# Altium PCB 矩阵键盘.PcbDoc
Units mm, origin at the board's own origin, x right, y up, seen from the top; angles counter-clockwise.
Board outline 152.4 x 101.6 mm, 2 copper layers (Top Layer, Bottom Layer); 17 components, 8 nets, 76 pads, 0 vias.
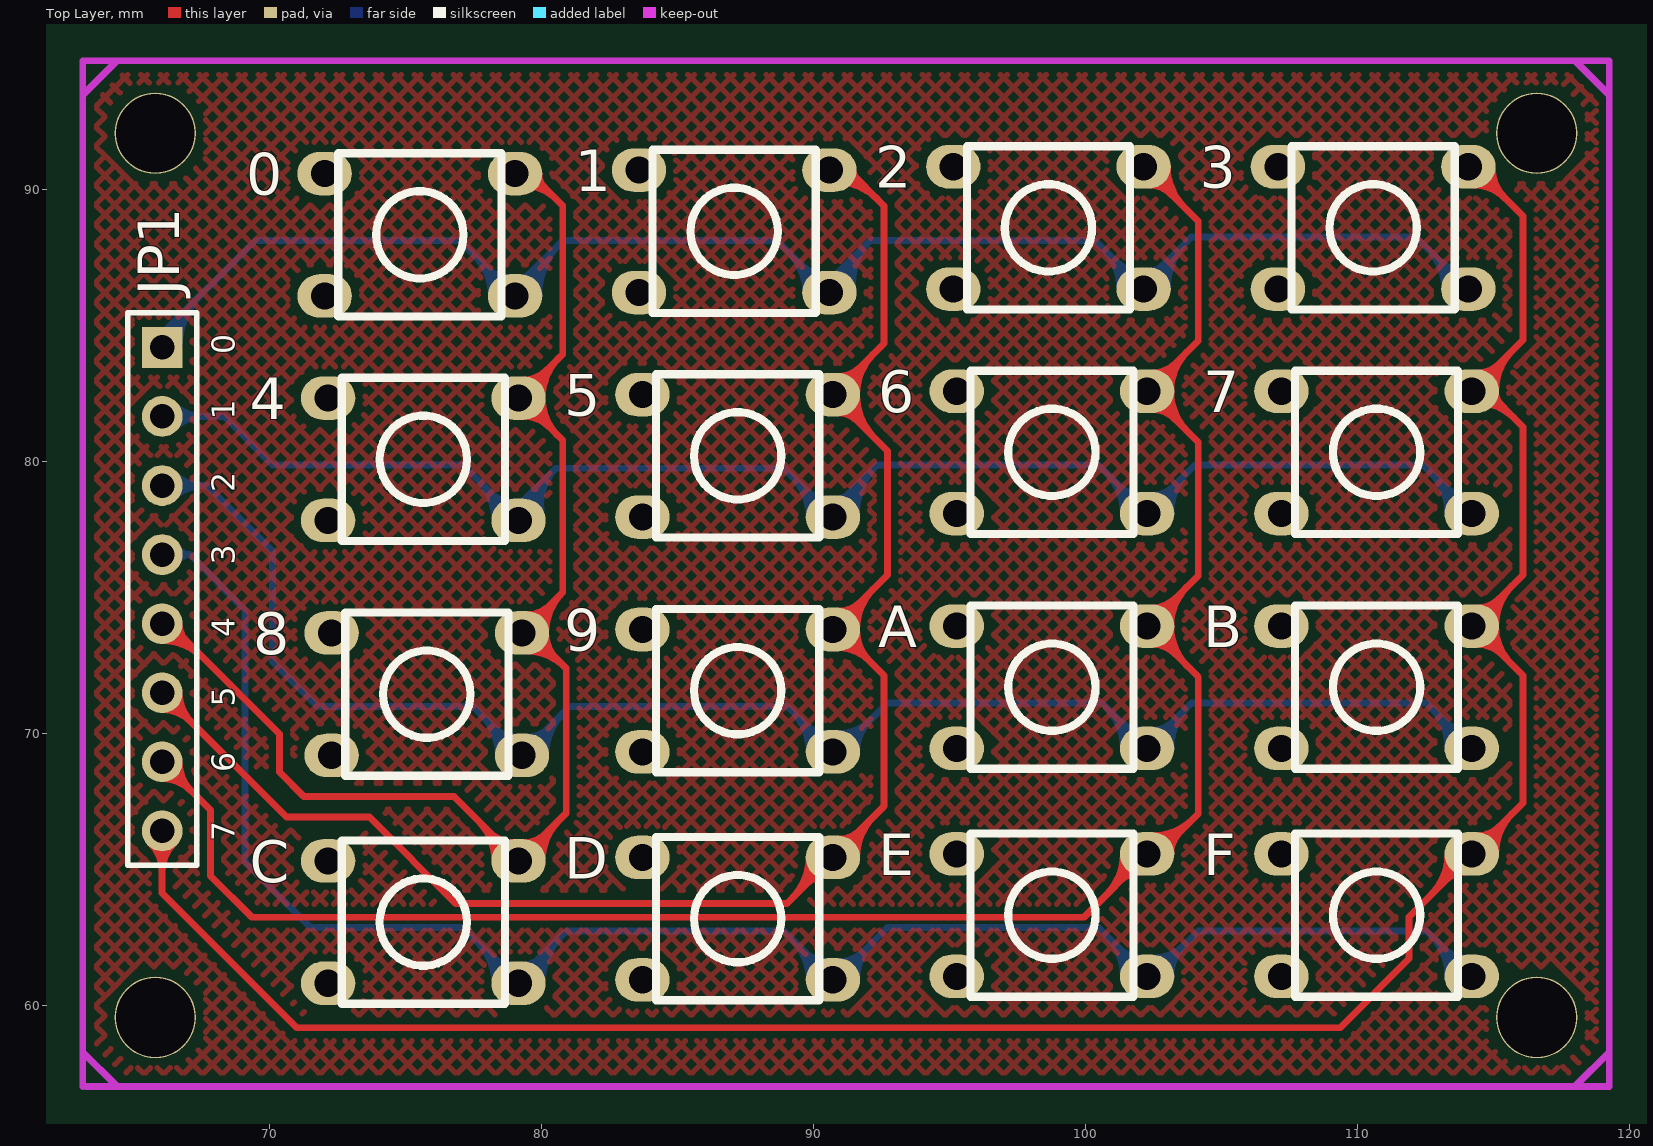
[diagram p0: Top Layer view]
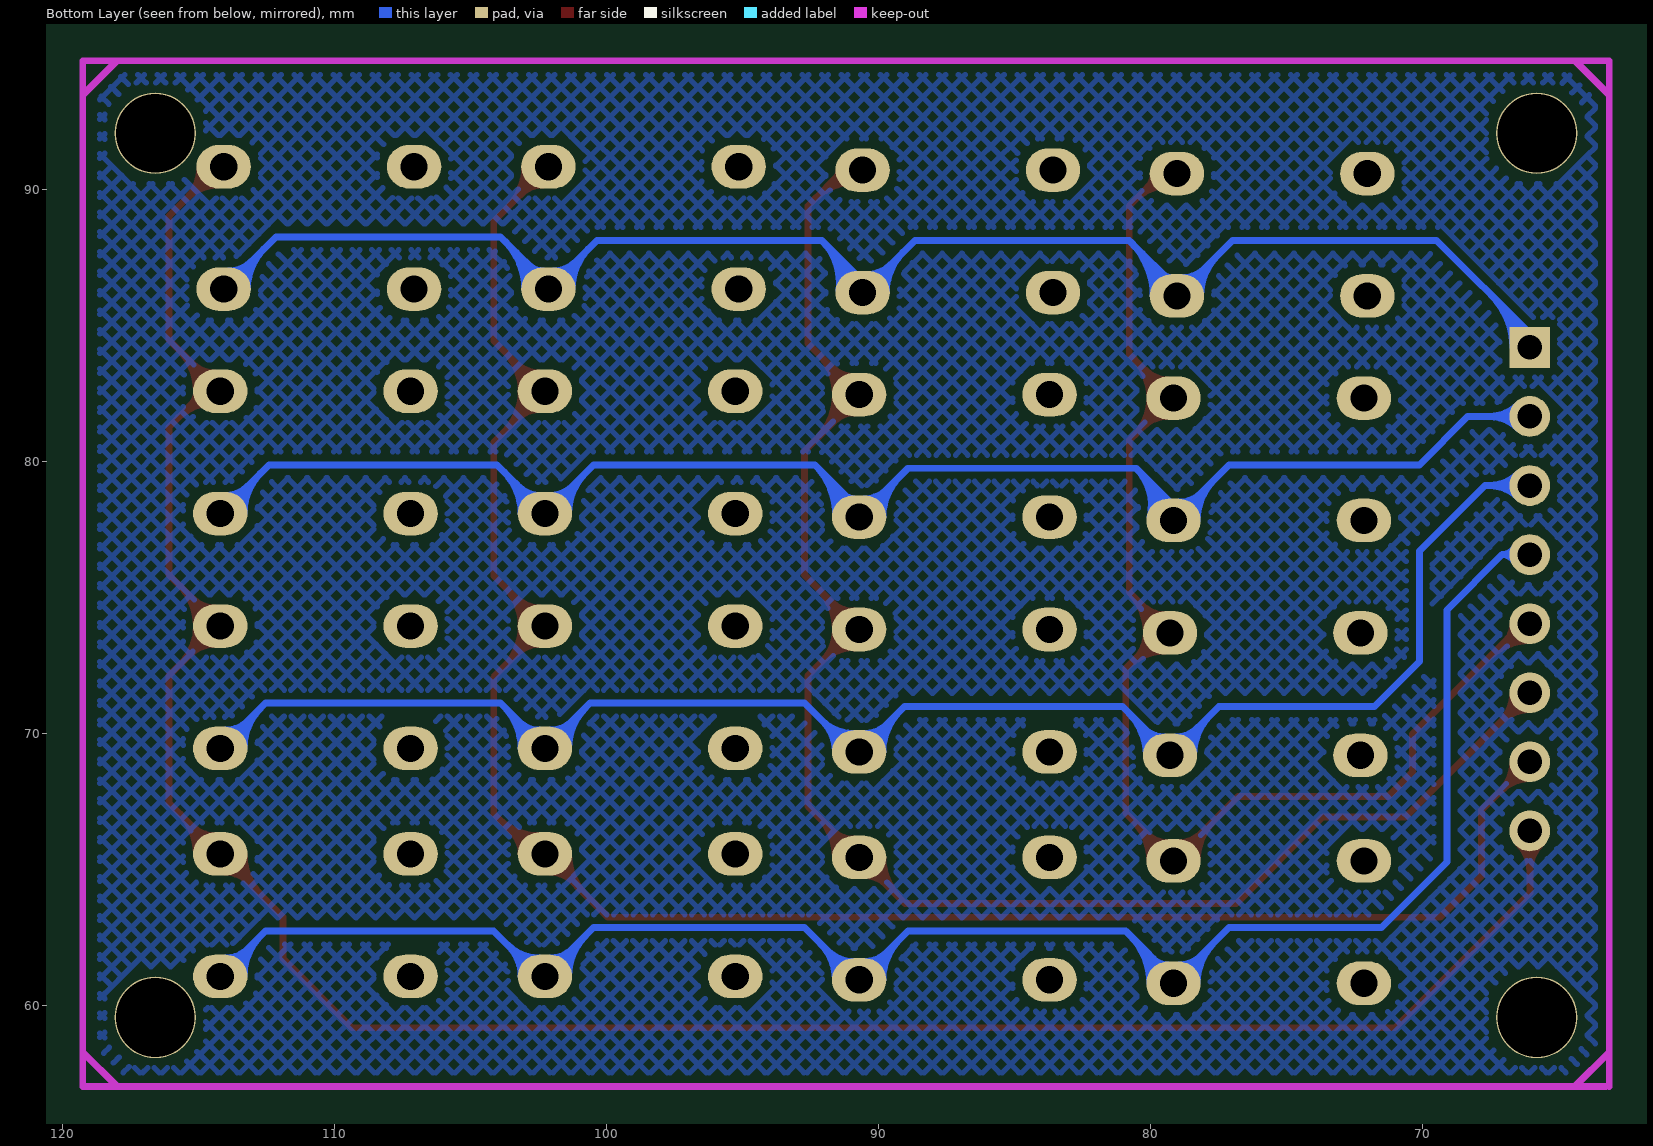
[diagram p1: Bottom Layer view, seen from below]

## Layer stack, top to bottom
Top Layer: signal copper 0.0356
Dielectric: dielectric 0.32, FR-4, Dk 4.8
Bottom Layer: signal copper 0.0356

## Board outline
25.4,25.4 177.8,25.4 177.8,127 25.4,127

## Design rules (kind name [scope] priority, off if disabled: settings)
Clearance [All] p1: gap=0.254
ComponentClearance [All] p1: gap=0.254 collisioncheckmode=3 verticalgap=0.254
PolygonConnect [All] p1: connectstyle=Relief reliefconductorwidth=0.254 reliefentries=4 polygonreliefangle="90 Angle"
RoutingVias [All] p1: holewidth=0.711 width=1.27 viastyle="Through Hole" minholewidth=0.711 minwidth=1.27 maxholewidth=0.711 maxwidth=1.27
SolderMaskExpansion [All] p1: expansion=0.102
TestPointUsage [All] p1: valid=0 allowmultiple=FALSE
Testpoint [All] p1: side=15 testpointundercomponent=TRUE minsize=1.016 maxsize=2.54 preferedsize=1.524 minholesize=0 maxholesize=1.016 preferedholesize=0.813 testpointgrid=0.025 style=1023 order=0-112345678
Width [All] p1: maxlimit=0.254 minlimit=0.254 preferedwidth=0.254
17 further rules are at their usual default settings.

## Classes and differential pairs
component class 矩阵键盘: 0 2 3 4 5 6 7 8 9 A B C D E F JP1

## Components (designator, comment, footprint, x,y, rotation, side; value= is the part's Value field where it differs from the comment)
0 "key1" an-6*6 69.342,93.472 r180 top
1 "key1" an-6*6 80.899,93.599 r180 top
2 "key1" an-6*6 92.456,93.726 r180 top
3 "key1" an-6*6 104.394,93.726 r180 top
4 "key2" an-6*6 69.469,85.217 r180 top
5 "key2" an-6*6 81.026,85.344 r180 top
6 "key2" an-6*6 92.583,85.471 r180 top
7 "key2" an-6*6 104.521,85.471 r180 top
8 "key3" an-6*6 69.596,76.581 r180 top
9 "key3" an-6*6 81.026,76.708 r180 top
A "key3" an-6*6 92.583,76.835 r180 top
B "key3" an-6*6 104.521,76.835 r180 top
C "key4" an-6*6 69.469,68.199 r180 top
D "key4" an-6*6 81.026,68.326 r180 top
E "key4" an-6*6 92.583,68.453 r180 top
F "key4" an-6*6 104.521,68.453 r180 top
JP1 "4*4矩阵键盘接口" HDR1X8 66.04,84.201 r270 top

## Footprints (in the part's own frame and the unit in brackets; to place one, negate y for a bottom-side part, rotate by r counter-clockwise, add the part's x,y. Pads: shape width x height; smd on the part's side, far side on the other; paste and mask are expansions set on the pad)
an-6*6 [mm]
  oval 2x1.6 hole 1: 1(-9.675,7.381) 2(-9.675,2.881) 3(-2.675,2.881) 4(-2.675,7.381)
  silkscreen extent -9.17,2.13 -3.18,8.13
HDR1X8 [mm] "Connector; Header; 8 Position"
  rect 1.5x1.5 hole 0.9: 1(0,0)
  round 1.5 hole 0.9: 2(2.54,0) 3(5.08,0) 4(7.62,0) 5(10.16,0) 6(12.7,0) 7(15.24,0) 8(17.78,0)
  silkscreen extent -1.27,-1.27 19.05,1.27

## Part data
0 1 2 3 4 5 6 7 8 9 A B C D E F: library part key
JP1: library part "Header 8", "Header, 8-Pin"

## Free pads (board coordinates)
  round 3 hole 2.9: 0(65.786,59.563) 0(65.786,92.075) 0(116.586,59.563) 0(116.586,92.075)

## Nets (pads, with @x,y where several pads share a name; then routed paths per layer and width w, separated by ;. In a path a pad name is that pad's centre, name@x,y a point inside that pad or via, vN(x,y) a via of type N, cw(c..) or ccw(c..) an arc to the next point about the centre after c; other vN are vias at no path point)
Net0_1: 0.1 1.1 2.1 3.1 JP1.1 | length 128.7
  Bottom Layer w0.254: JP1.1 66.04,84.709 69.469,88.138 76.97,88.138 0.1 79.017,86.383 80.772,88.138 88.654,88.138 1.1 90.574,86.637 92.075,88.138 ; 3.1 112.149,88.265 103.886,88.265 102.131,86.51 2.1 100.338,88.138 92.075,88.138 ; 92.075,88.138 ccw(c93.643,86.57) 91.442,86.3 cw(c93.643,86.57) 92.075,88.138 ; JP1.1@66.155,84.201 cw(c67.659,84.201) 66.596,85.265 ccw(c67.659,84.201) JP1.1@66.155,84.201 ; JP1.1@66.409,84.201 cw(c68.526,84.201) 67.029,85.698 ccw(c68.526,84.201) JP1.1@66.409,84.201 ; JP1.1@66.663,84.201 cw(c69.393,84.201) 67.463,86.132 ccw(c69.393,84.201) JP1.1@66.663,84.201 ; 77.527,87.582 cw(c76.036,86.091) 78.144,86.091 ccw(c76.036,86.091) 77.527,87.582 ; 77.96,87.148 cw(c76.904,86.091) 78.398,86.091 ccw(c76.904,86.091) 77.96,87.148 ; 78.01,87.099 ccw(c78.817,87.906) 78.817,86.764 cw(c78.817,87.906) 78.01,87.099 ; 0.1@79.217,86.764 ccw(c79.217,87.202) 79.526,86.892 cw(c79.217,87.202) 0.1@79.217,86.764 ; 0.1@79.382,86.091 cw(c80.968,86.091) 79.846,87.212 ccw(c80.968,86.091) 0.1@79.382,86.091 ; 0.1@79.636,86.091 cw(c81.835,86.091) 80.28,87.646 ccw(c81.835,86.091) 0.1@79.636,86.091 ; 0.1@79.89,86.091 cw(c82.702,86.091) 80.714,88.08 ccw(c82.702,86.091) 0.1@79.89,86.091 ; 89.084,87.709 cw(c87.593,86.218) 89.701,86.218 ccw(c87.593,86.218) 89.084,87.709 ; 89.517,87.275 cw(c88.461,86.218) 89.955,86.218 ccw(c88.461,86.218) 89.517,87.275 ; 89.567,87.226 ccw(c90.374,88.033) 90.374,86.891 cw(c90.374,88.033) 89.567,87.226 ; 1.1@90.686,86.207 cw(c91.674,86.329) 90.97,87.033 ccw(c91.674,86.329) 1.1@90.686,86.207 ; 1.1@90.938,86.238 cw(c92.331,86.409) 91.338,87.401 ccw(c92.331,86.409) 1.1@90.938,86.238 ; 1.1@91.19,86.269 cw(c92.987,86.49) 91.707,87.77 ccw(c92.987,86.49) 1.1@91.19,86.269 ; 100.641,87.836 cw(c99.15,86.345) 101.258,86.345 ccw(c99.15,86.345) 100.641,87.836 ; 101.074,87.402 cw(c100.018,86.345) 101.512,86.345 ccw(c100.018,86.345) 101.074,87.402 ; 101.124,87.353 ccw(c101.931,88.16) 101.931,87.018 cw(c101.931,88.16) 101.124,87.353 ; 2.1@102.331,87.018 ccw(c102.331,87.762) 102.857,87.236 cw(c102.331,87.762) 2.1@102.331,87.018 ; 2.1@102.496,86.345 cw(c103.775,86.345) 102.871,87.25 ccw(c103.775,86.345) 2.1@102.496,86.345 ; 2.1@102.75,86.345 cw(c104.642,86.345) 103.304,87.683 ccw(c104.642,86.345) 2.1@102.75,86.345 ; 2.1@103.004,86.345 cw(c105.509,86.345) 103.738,88.117 ccw(c105.509,86.345) 2.1@103.004,86.345 ; 112.579,87.836 cw(c111.088,86.345) 113.196,86.345 ccw(c111.088,86.345) 112.579,87.836 ; 113.012,87.402 cw(c111.956,86.345) 113.45,86.345 ccw(c111.956,86.345) 113.012,87.402 ; 113.062,87.353 ccw(c113.869,88.16) 113.869,87.018 cw(c113.869,88.16) 113.062,87.353
Net0_2: 0.2 4.2 8.2 C.2 JP1.5 | length 105.9
  Top Layer w0.254: JP1.5 66.294,74.041 70.358,69.977 70.358,68.58 71.247,67.691 76.771,67.691 C.2 80.899,67.073 80.899,72.39 79.589,73.7 8.2 80.772,75.201 80.772,80.772 79.208,82.336 4.2 80.772,83.964 80.772,89.408 79.589,90.591 0.2 ; 4.2@79.763,82.336 ccw(c81.103,82.336) 80.156,81.388 cw(c81.103,82.336) 4.2@79.763,82.336 ; 4.2@79.763,82.336 cw(c81.257,82.336) 80.201,83.393 ccw(c81.257,82.336) 4.2@79.763,82.336 ; 8.2@79.89,73.7 cw(c81.384,73.7) 80.328,74.757 ccw(c81.384,73.7) 8.2@79.89,73.7 ; 8.2@79.89,73.7 ccw(c80.617,73.7) 80.103,73.186 cw(c80.617,73.7) 8.2@79.89,73.7 ; 4.2@80.017,82.336 ccw(c81.971,82.336) 80.589,80.955 cw(c81.971,82.336) 4.2@80.017,82.336 ; 4.2@80.017,82.336 cw(c82.125,82.336) 80.634,83.826 ccw(c82.125,82.336) 4.2@80.017,82.336 ; 8.2@80.144,73.7 cw(c82.252,73.7) 80.761,75.19 ccw(c82.252,73.7) 8.2@80.144,73.7 ; 8.2@80.144,73.7 ccw(c81.484,73.7) 80.537,72.752 cw(c81.484,73.7) 8.2@80.144,73.7 ; JP1.5@66.04,73.418 cw(c66.04,71.301) 67.537,72.798 ccw(c66.04,71.301) JP1.5@66.04,73.418 ; JP1.5@66.04,73.672 cw(c66.04,72.168) 67.104,73.231 ccw(c66.04,72.168) JP1.5@66.04,73.672 ; JP1.5@66.663,74.041 ccw(c67.554,74.041) 66.924,73.411 cw(c67.554,74.041) JP1.5@66.663,74.041 ; 77.654,66.808 cw(c76.163,65.318) 78.271,65.318 ccw(c76.163,65.318) 77.654,66.808 ; 78.087,66.375 cw(c77.031,65.318) 78.525,65.318 ccw(c77.031,65.318) 78.087,66.375 ; 78.137,66.326 ccw(c78.944,67.133) 78.944,65.991 cw(c78.944,67.133) 78.137,66.326 ; 0.2@79.22,90.426 cw(c79.244,89.196) 80.114,90.066 ccw(c79.244,89.196) 0.2@79.22,90.426 ; 0.2@79.225,90.172 cw(c79.26,88.368) 80.536,89.644 ccw(c79.26,88.368) 0.2@79.225,90.172 ; C.2@79.344,65.991 ccw(c79.344,67.133) 80.151,66.326 cw(c79.344,67.133) C.2@79.344,65.991 ; 4.2@79.344,81.663 cw(c79.344,80.367) 80.26,81.284 ccw(c79.344,80.367) 4.2@79.344,81.663 ; 4.2@79.344,83.009 ccw(c79.344,84.151) 80.151,83.344 cw(c79.344,84.151) 4.2@79.344,83.009 ; 8.2@79.471,73.027 cw(c79.471,71.118) 80.821,72.468 ccw(c79.471,71.118) 8.2@79.471,73.027 ; 8.2@79.471,73.281 cw(c79.471,71.985) 80.387,72.902 ccw(c79.471,71.985) 8.2@79.471,73.281 ; 8.2@79.471,74.373 ccw(c79.471,75.515) 80.278,74.708 cw(c79.471,75.515) 8.2@79.471,74.373 ; C.2@79.763,65.318 cw(c81.257,65.318) 80.201,66.375 ccw(c81.257,65.318) C.2@79.763,65.318 ; 0.2@79.89,90.591 ccw(c80.617,90.591) 80.103,90.077 cw(c80.617,90.591) 0.2@79.89,90.591 ; C.2@80.017,65.318 cw(c82.125,65.318) 80.634,66.808 ccw(c82.125,65.318) C.2@80.017,65.318
Net1_2: 1.2 5.2 9.2 D.2 JP1.6 | length 120.8
  Top Layer w0.254: JP1.6 70.612,66.929 73.66,66.929 76.835,63.754 89.01,63.754 92.583,67.327 92.583,72.136 90.892,73.827 9.2 92.71,75.836 92.71,80.391 90.701,82.4 5.2 92.583,84.345 92.583,89.408 91.273,90.718 1.2 ; 66.67,70.871 ccw(c66.04,70.241) 66.04,71.132 cw(c66.04,70.241) 66.67,70.871 ; 66.67,70.871 cw(c67.3,71.501) 66.409,71.501 ccw(c67.3,71.501) 66.67,70.871 ; 67.104,70.437 ccw(c66.04,69.374) 66.04,70.878 cw(c66.04,69.374) 67.104,70.437 ; 67.104,70.437 cw(c68.167,71.501) 66.663,71.501 ccw(c68.167,71.501) 67.104,70.437 ; 9.2@91.32,73.827 ccw(c92.354,73.827) 91.623,73.096 cw(c92.354,73.827) 9.2@91.32,73.827 ; 9.2@91.32,73.827 cw(c92.814,73.827) 91.758,74.884 ccw(c92.814,73.827) 9.2@91.32,73.827 ; 5.2@91.32,82.463 ccw(c92.967,82.463) 91.802,81.299 cw(c92.967,82.463) 5.2@91.32,82.463 ; 5.2@91.32,82.463 cw(c92.814,82.463) 91.758,83.52 ccw(c92.814,82.463) 5.2@91.32,82.463 ; 9.2@91.574,73.827 ccw(c93.221,73.827) 92.056,72.663 cw(c93.221,73.827) 9.2@91.574,73.827 ; 9.2@91.574,73.827 cw(c93.682,73.827) 92.191,75.317 ccw(c93.682,73.827) 9.2@91.574,73.827 ; 5.2@91.574,82.463 ccw(c93.834,82.463) 92.236,80.865 cw(c93.834,82.463) 5.2@91.574,82.463 ; 5.2@91.574,82.463 cw(c93.682,82.463) 92.191,83.953 ccw(c93.682,82.463) 5.2@91.574,82.463 ; 89.211,63.955 ccw(c87.72,65.445) 89.828,65.445 cw(c87.72,65.445) 89.211,63.955 ; 89.644,64.388 ccw(c88.588,65.445) 90.082,65.445 cw(c88.588,65.445) 89.644,64.388 ; 89.694,64.438 cw(c90.501,63.63) 90.501,64.772 ccw(c90.501,63.63) 89.694,64.438 ; 1.2@90.774,90.299 cw(c90.774,88.083) 92.341,89.65 ccw(c90.774,88.083) 1.2@90.774,90.299 ; 1.2@90.774,90.553 cw(c90.774,88.951) 91.907,90.084 ccw(c90.774,88.951) 1.2@90.774,90.553 ; D.2@90.901,66.118 ccw(c90.901,67.26) 91.708,66.453 cw(c90.901,67.26) D.2@90.901,66.118 ; 9.2@90.901,73.154 cw(c90.901,71.552) 92.034,72.685 ccw(c90.901,71.552) 9.2@90.901,73.154 ; 9.2@90.901,73.408 cw(c90.901,72.419) 91.601,73.118 ccw(c90.901,72.419) 9.2@90.901,73.408 ; 9.2@90.901,74.5 ccw(c90.901,75.642) 91.708,74.835 cw(c90.901,75.642) 9.2@90.901,74.5 ; 5.2@90.901,81.79 cw(c90.901,80.801) 91.601,81.5 ccw(c90.901,80.801) 5.2@90.901,81.79 ; 5.2@90.901,83.136 ccw(c90.901,84.278) 91.708,83.471 cw(c90.901,84.278) 5.2@90.901,83.136 ; 5.2@91.066,82.463 ccw(c92.1,82.463) 91.369,81.732 cw(c92.1,82.463) 5.2@91.066,82.463 ; D.2@91.32,65.445 cw(c92.814,65.445) 91.758,66.502 ccw(c92.814,65.445) D.2@91.32,65.445 ; 1.2@91.447,90.718 ccw(c91.868,90.718) 91.57,90.421 cw(c91.868,90.718) 1.2@91.447,90.718 ; D.2@91.574,65.445 cw(c93.682,65.445) 92.191,66.935 ccw(c93.682,65.445) D.2@91.574,65.445
Net2_2: 2.2 6.2 A.2 E.2 JP1.7 | length 130.8
  Top Layer w0.254: JP1.7 67.818,67.183 67.818,64.77 69.342,63.246 99.932,63.246 E.2 102.656,65.572 104.14,67.056 104.14,72.072 A.2 102.275,73.954 104.14,75.819 104.14,80.708 6.2 102.275,82.59 104.14,84.455 104.14,88.836 2.2 ; 66.67,68.331 ccw(c66.04,67.701) 66.04,68.592 cw(c66.04,67.701) 66.67,68.331 ; 66.67,68.331 cw(c67.3,68.961) 66.409,68.961 ccw(c67.3,68.961) 66.67,68.331 ; 67.104,67.897 ccw(c66.04,66.834) 66.04,68.338 cw(c66.04,66.834) 67.104,67.897 ; 67.104,67.897 cw(c68.167,68.961) 66.663,68.961 ccw(c68.167,68.961) 67.104,67.897 ; A.2@102.877,73.954 ccw(c104.371,73.954) 103.315,72.897 cw(c104.371,73.954) A.2@102.877,73.954 ; A.2@102.877,73.954 cw(c104.33,73.954) 103.303,74.982 ccw(c104.33,73.954) A.2@102.877,73.954 ; 6.2@102.877,82.59 ccw(c104.371,82.59) 103.315,81.533 cw(c104.371,82.59) 6.2@102.877,82.59 ; 6.2@102.877,82.59 cw(c104.33,82.59) 103.303,83.618 ccw(c104.33,82.59) 6.2@102.877,82.59 ; A.2@103.131,73.954 ccw(c105.239,73.954) 103.748,72.464 cw(c105.239,73.954) A.2@103.131,73.954 ; A.2@103.131,73.954 cw(c105.197,73.954) 103.736,75.415 ccw(c105.197,73.954) A.2@103.131,73.954 ; 6.2@103.131,82.59 ccw(c105.239,82.59) 103.748,81.1 cw(c105.239,82.59) 6.2@103.131,82.59 ; 6.2@103.131,82.59 cw(c105.197,82.59) 103.736,84.051 ccw(c105.197,82.59) 6.2@103.131,82.59 ; 100.768,64.082 ccw(c99.277,65.572) 101.385,65.572 cw(c99.277,65.572) 100.768,64.082 ; 101.201,64.515 ccw(c100.145,65.572) 101.639,65.572 cw(c100.145,65.572) 101.201,64.515 ; 101.251,64.565 cw(c102.058,63.757) 102.058,64.899 ccw(c102.058,63.757) 101.251,64.565 ; 2.2@102.331,90.172 cw(c102.331,89.03) 103.138,89.838 ccw(c102.331,89.03) 2.2@102.331,90.172 ; E.2@102.458,65.991 ccw(c102.458,67.481) 103.512,66.428 cw(c102.458,67.481) E.2@102.458,65.991 ; E.2@102.458,66.245 ccw(c102.458,68.348) 103.945,66.861 cw(c102.458,68.348) E.2@102.458,66.245 ; A.2@102.458,73.281 cw(c102.458,72.139) 103.265,72.947 ccw(c102.458,72.139) A.2@102.458,73.281 ; A.2@102.458,74.627 ccw(c102.458,75.811) 103.295,74.974 cw(c102.458,75.811) A.2@102.458,74.627 ; 6.2@102.458,81.917 cw(c102.458,80.775) 103.265,81.583 ccw(c102.458,80.775) 6.2@102.458,81.917 ; 6.2@102.458,83.263 ccw(c102.458,84.447) 103.295,83.61 cw(c102.458,84.447) 6.2@102.458,83.263 ; 2.2@102.75,90.845 ccw(c104.244,90.845) 103.188,89.788 cw(c104.244,90.845) 2.2@102.75,90.845 ; 2.2@103.004,90.845 ccw(c105.112,90.845) 103.621,89.355 cw(c105.112,90.845) 2.2@103.004,90.845 ; E.2@103.131,65.572 cw(c104.277,65.572) 103.467,66.383 ccw(c104.277,65.572) E.2@103.131,65.572
Net3_2: 3.2 7.2 B.2 F.2 JP1.8 | length 145.5
  Top Layer w0.254: JP1.8 66.04,64.135 70.993,59.182 109.347,59.182 111.887,61.722 111.887,63.263 116.078,67.454 116.078,72.136 114.26,73.954 B.2 116.078,75.836 116.078,81.28 114.768,82.59 7.2 116.078,84.472 116.078,89.027 114.26,90.845 3.2 ; 66.04,64.917 ccw(c64.536,64.917) 65.599,65.98 cw(c64.536,64.917) 66.04,64.917 ; 66.04,64.917 cw(c67.544,64.917) 66.481,65.98 ccw(c67.544,64.917) 66.04,64.917 ; 66.04,65.53 ccw(c65.149,65.53) 65.779,66.16 cw(c65.149,65.53) 66.04,65.53 ; 66.04,65.53 cw(c66.931,65.53) 66.301,66.16 ccw(c66.931,65.53) 66.04,65.53 ; B.2@114.815,73.954 ccw(c116.155,73.954) 115.208,73.006 cw(c116.155,73.954) B.2@114.815,73.954 ; B.2@114.815,73.954 cw(c116.309,73.954) 115.253,75.011 ccw(c116.309,73.954) B.2@114.815,73.954 ; B.2@115.069,73.954 ccw(c117.023,73.954) 115.641,72.573 cw(c117.023,73.954) B.2@115.069,73.954 ; B.2@115.069,73.954 cw(c117.177,73.954) 115.686,75.444 ccw(c117.177,73.954) B.2@115.069,73.954 ; 7.2@115.069,82.59 cw(c117.177,82.59) 115.686,84.08 ccw(c117.177,82.59) 7.2@115.069,82.59 ; 7.2@115.069,82.59 ccw(c115.796,82.59) 115.282,82.076 cw(c115.796,82.59) 7.2@115.069,82.59 ; 112.706,64.082 ccw(c111.215,65.572) 113.323,65.572 cw(c111.215,65.572) 112.706,64.082 ; 113.139,64.515 ccw(c112.083,65.572) 113.577,65.572 cw(c112.083,65.572) 113.139,64.515 ; 113.189,64.565 cw(c113.996,63.757) 113.996,64.899 ccw(c113.996,63.757) 113.189,64.565 ; 3.2@114.269,90.172 cw(c114.269,88.57) 115.402,89.703 ccw(c114.269,88.57) 3.2@114.269,90.172 ; 3.2@114.269,90.426 cw(c114.269,89.437) 114.969,90.136 ccw(c114.269,89.437) 3.2@114.269,90.426 ; F.2@114.396,66.245 ccw(c114.396,67.387) 115.203,66.58 cw(c114.396,67.387) F.2@114.396,66.245 ; B.2@114.396,73.281 cw(c114.396,71.985) 115.312,72.902 ccw(c114.396,71.985) B.2@114.396,73.281 ; B.2@114.396,74.627 ccw(c114.396,75.769) 115.203,74.962 cw(c114.396,75.769) B.2@114.396,74.627 ; 7.2@114.396,82.171 cw(c114.396,80.262) 115.746,81.612 ccw(c114.396,80.262) 7.2@114.396,82.171 ; 7.2@114.396,82.425 cw(c114.396,81.129) 115.312,82.046 ccw(c114.396,81.129) 7.2@114.396,82.425 ; 7.2@114.396,83.263 ccw(c114.396,84.405) 115.203,83.598 cw(c114.396,84.405) 7.2@114.396,83.263 ; 3.2@114.688,90.845 ccw(c115.722,90.845) 114.991,90.114 cw(c115.722,90.845) 3.2@114.688,90.845 ; F.2@114.815,65.572 cw(c116.309,65.572) 115.253,66.629 ccw(c116.309,65.572) F.2@114.815,65.572 ; 7.2@114.815,82.59 cw(c116.309,82.59) 115.253,83.647 ccw(c116.309,82.59) 7.2@114.815,82.59 ; 3.2@114.942,90.845 ccw(c116.589,90.845) 115.424,89.681 cw(c116.589,90.845) 3.2@114.942,90.845 ; F.2@115.069,65.572 cw(c117.177,65.572) 115.686,67.062 ccw(c117.177,65.572) F.2@115.069,65.572
Net4_1: 4.1 5.1 6.1 7.1 JP1.2 | length 123.7
  Bottom Layer w0.254: JP1.2 68.326,81.661 70.104,79.883 77.097,79.883 4.1 79.144,78.382 80.518,79.756 ; 7.1 112.403,79.883 104.013,79.883 102.258,78.128 6.1 100.465,79.883 92.329,79.883 ; 66.931,81.661 ccw(c66.931,80.77) 66.301,81.4 cw(c66.931,80.77) 66.931,81.661 ; 66.931,81.661 cw(c66.931,82.552) 66.301,81.922 ccw(c66.931,82.552) 66.931,81.661 ; 67.544,81.661 ccw(c67.544,80.157) 66.481,81.22 cw(c67.544,80.157) 67.544,81.661 ; 67.544,81.661 cw(c67.544,83.165) 66.481,82.102 ccw(c67.544,83.165) 67.544,81.661 ; 80.518,79.756 ccw(c81.876,78.398) 80.001,77.982 cw(c81.876,78.398) 80.518,79.756 ; 80.518,79.756 88.908,79.756 5.1 90.701,78.255 92.329,79.883 ; 92.329,79.883 ccw(c94.155,78.057) 91.574,77.983 cw(c94.155,78.057) 92.329,79.883 ; 77.654,79.327 cw(c76.163,77.836) 78.271,77.836 ccw(c76.163,77.836) 77.654,79.327 ; 78.087,78.893 cw(c77.031,77.836) 78.525,77.836 ccw(c77.031,77.836) 78.087,78.893 ; 78.137,78.844 ccw(c78.944,79.651) 78.944,78.509 cw(c78.944,79.651) 78.137,78.844 ; 4.1@79.257,77.817 cw(c80.269,78.041) 79.536,78.774 ccw(c80.269,78.041) 4.1@79.257,77.817 ; 4.1@79.505,77.872 cw(c80.804,78.16) 79.863,79.101 ccw(c80.804,78.16) 4.1@79.505,77.872 ; 4.1@79.753,77.927 cw(c81.34,78.279) 80.191,79.429 ccw(c81.34,78.279) 4.1@79.753,77.927 ; 89.211,79.454 cw(c87.72,77.963) 89.828,77.963 ccw(c87.72,77.963) 89.211,79.454 ; 89.644,79.02 cw(c88.588,77.963) 90.082,77.963 ccw(c88.588,77.963) 89.644,79.02 ; 89.694,78.971 ccw(c90.501,79.778) 90.501,78.636 cw(c90.501,79.778) 89.694,78.971 ; 5.1@90.901,78.636 ccw(c90.901,79.074) 91.21,78.764 cw(c90.901,79.074) 5.1@90.901,78.636 ; 5.1@91.066,77.968 cw(c92.535,78.01) 91.496,79.05 ccw(c92.535,78.01) 5.1@91.066,77.968 ; 5.1@91.32,77.975 cw(c93.345,78.034) 91.912,79.466 ccw(c93.345,78.034) 5.1@91.32,77.975 ; 100.768,79.581 cw(c99.277,78.09) 101.385,78.09 ccw(c99.277,78.09) 100.768,79.581 ; 101.201,79.147 cw(c100.145,78.09) 101.639,78.09 ccw(c100.145,78.09) 101.201,79.147 ; 101.251,79.098 ccw(c102.058,79.905) 102.058,78.763 cw(c102.058,79.905) 101.251,79.098 ; 6.1@102.458,78.763 ccw(c102.458,79.814) 103.201,79.071 cw(c102.458,79.814) 6.1@102.458,78.763 ; 6.1@102.623,78.09 cw(c103.595,78.09) 102.908,78.778 ccw(c103.595,78.09) 6.1@102.623,78.09 ; 6.1@102.877,78.09 cw(c104.463,78.09) 103.341,79.211 ccw(c104.463,78.09) 6.1@102.877,78.09 ; 6.1@103.131,78.09 cw(c105.33,78.09) 103.775,79.645 ccw(c105.33,78.09) 6.1@103.131,78.09 ; 112.706,79.581 cw(c111.215,78.09) 113.323,78.09 ccw(c111.215,78.09) 112.706,79.581 ; 113.139,79.147 cw(c112.083,78.09) 113.577,78.09 ccw(c112.083,78.09) 113.139,79.147 ; 113.189,79.098 ccw(c113.996,79.905) 113.996,78.763 cw(c113.996,79.905) 113.189,79.098
Net8_1: 8.1 9.1 A.1 B.1 JP1.3 | length 122.8
  Bottom Layer w0.254: JP1.3 67.691,79.121 70.104,76.708 70.104,72.644 71.755,70.993 77.478,70.993 8.1 79.271,69.238 81.026,70.993 89.035,70.993 9.1 90.917,69.327 92.71,71.12 100.592,71.12 A.1 102.258,69.492 103.886,71.12 112.53,71.12 B.1 ; 66.931,79.121 ccw(c66.931,78.23) 66.301,78.86 cw(c66.931,78.23) 66.931,79.121 ; 66.931,79.121 cw(c66.931,80.012) 66.301,79.382 ccw(c66.931,80.012) 66.931,79.121 ; 67.544,79.121 ccw(c67.544,77.617) 66.481,78.68 cw(c67.544,77.617) 67.544,79.121 ; 67.544,79.121 cw(c67.544,80.625) 66.481,79.562 ccw(c67.544,80.625) 67.544,79.121 ; 77.781,70.691 cw(c76.29,69.2) 78.398,69.2 ccw(c76.29,69.2) 77.781,70.691 ; 78.214,70.257 cw(c77.158,69.2) 78.652,69.2 ccw(c77.158,69.2) 78.214,70.257 ; 78.264,70.208 ccw(c79.071,71.015) 79.071,69.873 cw(c79.071,71.015) 78.264,70.208 ; 8.1@79.471,69.873 ccw(c79.471,70.924) 80.214,70.181 cw(c79.471,70.924) 8.1@79.471,69.873 ; 8.1@79.636,69.2 cw(c80.608,69.2) 79.921,69.888 ccw(c80.608,69.2) 8.1@79.636,69.2 ; 8.1@79.89,69.2 cw(c81.476,69.2) 80.354,70.321 ccw(c81.476,69.2) 8.1@79.89,69.2 ; 8.1@80.144,69.2 cw(c82.343,69.2) 80.788,70.755 ccw(c82.343,69.2) 8.1@80.144,69.2 ; 89.211,70.818 cw(c87.72,69.327) 89.828,69.327 ccw(c87.72,69.327) 89.211,70.818 ; 89.644,70.384 cw(c88.588,69.327) 90.082,69.327 ccw(c88.588,69.327) 89.644,70.384 ; 89.694,70.335 ccw(c90.501,71.142) 90.501,70 cw(c90.501,71.142) 89.694,70.335 ; 9.1@90.901,69.746 ccw(c90.901,70.797) 91.644,70.054 cw(c90.901,70.797) 9.1@90.901,69.746 ; 9.1@90.901,70 ccw(c90.901,71.664) 92.078,70.488 cw(c90.901,71.664) 9.1@90.901,70 ; 9.1@91.32,69.327 cw(c92.292,69.327) 91.605,70.015 ccw(c92.292,69.327) 9.1@91.32,69.327 ; 9.1@91.574,69.327 cw(c93.16,69.327) 92.038,70.448 ccw(c93.16,69.327) 9.1@91.574,69.327 ; 100.768,70.945 cw(c99.277,69.454) 101.385,69.454 ccw(c99.277,69.454) 100.768,70.945 ; 101.201,70.511 cw(c100.145,69.454) 101.639,69.454 ccw(c100.145,69.454) 101.201,70.511 ; 101.251,70.462 ccw(c102.058,71.269) 102.058,70.127 cw(c102.058,71.269) 101.251,70.462 ; A.1@102.458,70.127 ccw(c102.458,71.178) 103.201,70.435 cw(c102.458,71.178) A.1@102.458,70.127 ; A.1@102.623,69.454 cw(c103.595,69.454) 102.908,70.142 ccw(c103.595,69.454) A.1@102.623,69.454 ; A.1@102.877,69.454 cw(c104.463,69.454) 103.341,70.575 ccw(c104.463,69.454) A.1@102.877,69.454 ; A.1@103.131,69.454 cw(c105.33,69.454) 103.775,71.009 ccw(c105.33,69.454) A.1@103.131,69.454 ; 112.706,70.945 cw(c111.215,69.454) 113.323,69.454 ccw(c111.215,69.454) 112.706,70.945 ; 113.139,70.511 cw(c112.083,69.454) 113.577,69.454 ccw(c112.083,69.454) 113.139,70.511 ; 113.189,70.462 ccw(c113.996,71.269) 113.996,70.127 cw(c113.996,71.269) 113.189,70.462
NetC_1: C.1 D.1 E.1 F.1 JP1.4 | length 123.4
  Bottom Layer w0.254: JP1.4 67.056,76.581 ; F.1 112.53,62.738 104.14,62.738 102.474,61.072 E.1 100.465,62.865 92.71,62.865 90.79,60.945 D.1 88.908,62.738 80.899,62.738 79.144,60.983 C.1 77.097,62.865 71.501,62.865 69.088,65.278 69.088,74.549 67.056,76.581 ; 67.056,76.581 ccw(c67.056,76.064) 66.595,76.298 cw(c67.056,76.064) 67.056,76.581 ; 67.056,76.581 cw(c67.056,77.098) 66.595,76.864 ccw(c67.056,77.098) 67.056,76.581 ; 77.654,62.309 cw(c76.163,60.818) 78.271,60.818 ccw(c76.163,60.818) 77.654,62.309 ; 78.087,61.875 cw(c77.031,60.818) 78.525,60.818 ccw(c77.031,60.818) 78.087,61.875 ; 78.137,61.826 ccw(c78.944,62.633) 78.944,61.491 cw(c78.944,62.633) 78.137,61.826 ; C.1@79.344,61.491 ccw(c79.344,62.235) 79.87,61.709 cw(c79.344,62.235) C.1@79.344,61.491 ; C.1@79.509,60.818 cw(c80.788,60.818) 79.884,61.723 ccw(c80.788,60.818) C.1@79.509,60.818 ; C.1@79.763,60.818 cw(c81.655,60.818) 80.317,62.156 ccw(c81.655,60.818) C.1@79.763,60.818 ; C.1@80.017,60.818 cw(c82.522,60.818) 80.751,62.59 ccw(c82.522,60.818) C.1@80.017,60.818 ; 89.211,62.436 cw(c87.72,60.945) 89.828,60.945 ccw(c87.72,60.945) 89.211,62.436 ; 89.644,62.002 cw(c88.588,60.945) 90.082,60.945 ccw(c88.588,60.945) 89.644,62.002 ; 89.694,61.953 ccw(c90.501,62.76) 90.501,61.618 cw(c90.501,62.76) 89.694,61.953 ; D.1@90.901,61.364 ccw(c90.901,62.108) 91.427,61.582 cw(c90.901,62.108) D.1@90.901,61.364 ; D.1@90.901,61.618 ccw(c90.901,62.975) 91.861,62.016 cw(c90.901,62.975) D.1@90.901,61.618 ; D.1@91.32,60.945 cw(c92.599,60.945) 91.695,61.85 ccw(c92.599,60.945) D.1@91.32,60.945 ; D.1@91.574,60.945 cw(c93.466,60.945) 92.128,62.283 ccw(c93.466,60.945) D.1@91.574,60.945 ; 100.768,62.563 cw(c99.277,61.072) 101.385,61.072 ccw(c99.277,61.072) 100.768,62.563 ; 101.201,62.129 cw(c100.145,61.072) 101.639,61.072 ccw(c100.145,61.072) 101.201,62.129 ; 101.251,62.08 ccw(c102.058,62.887) 102.058,61.745 cw(c102.058,62.887) 101.251,62.08 ; E.1@102.458,61.491 ccw(c102.458,62.542) 103.201,61.799 cw(c102.458,62.542) E.1@102.458,61.491 ; E.1@102.458,61.745 ccw(c102.458,63.409) 103.635,62.233 cw(c102.458,63.409) E.1@102.458,61.745 ; E.1@102.877,61.072 cw(c103.849,61.072) 103.162,61.76 ccw(c103.849,61.072) E.1@102.877,61.072 ; E.1@103.131,61.072 cw(c104.717,61.072) 103.595,62.193 ccw(c104.717,61.072) E.1@103.131,61.072 ; 112.706,62.563 cw(c111.215,61.072) 113.323,61.072 ccw(c111.215,61.072) 112.706,62.563 ; 113.139,62.129 cw(c112.083,61.072) 113.577,61.072 ccw(c112.083,61.072) 113.139,62.129 ; 113.189,62.08 ccw(c113.996,62.887) 113.996,61.745 cw(c113.996,62.887) 113.189,62.08
pads on no net: 0.3 0.4 1.3 1.4 2.3 2.4 3.3 3.4 4.3 4.4 5.3 5.4 6.3 6.4 7.3 7.4 8.3 8.4 9.3 9.4 A.3 A.4 B.3 B.4 C.3 C.4 D.3 D.4 E.3 E.4 F.3 F.4

## Polygon pours and split planes (outlines as drawn)
no net on Top Layer (hatched 45Degree grid 0.508 track 0.203): 63.5,94.234 118.872,94.234 118.872,57.531 63.631,57.531 63.631,94.234
no net on Bottom Layer (hatched 45Degree grid 0.508 track 0.203): 63.757,94.234 118.618,94.234 118.618,57.531 63.627,57.531 63.627,94.234

## Keep-outs
Keep-Out Layer:
  lines w0.254: 63.119,57.023 63.119,94.742 119.253,94.742 119.253,57.023 63.246,57.023 ; 63.119,58.42 63.119,58.293 64.389,57.023 ; 63.119,93.472 64.389,94.742 ; 117.983,57.023 119.253,58.293 ; 117.983,94.742 119.253,93.472

## Silkscreen, mask and mechanical layers (free items; w line width, h text height)
Top Overlay:
  text "0" at 68.707,83.947 h0.84 r90
  text "1" at 68.707,81.534 h0.84 r90
  text "2" at 68.707,78.867 h0.84 r90
  text "3" at 68.707,76.2 h0.84 r90
  text "4" at 68.707,73.533 h0.84 r90
  text "5" at 68.707,70.993 h0.84 r90
  text "6" at 68.707,68.58 h0.84 r90
  text "7" at 68.707,66.04 h0.84 r90
Mechanical 1:
  lines w0.254: 63.119,93.345 63.119,93.599